# EAGLE board MicroMod_SAMD51-Panel (EAGLE 9.6.2), part 1 of 6
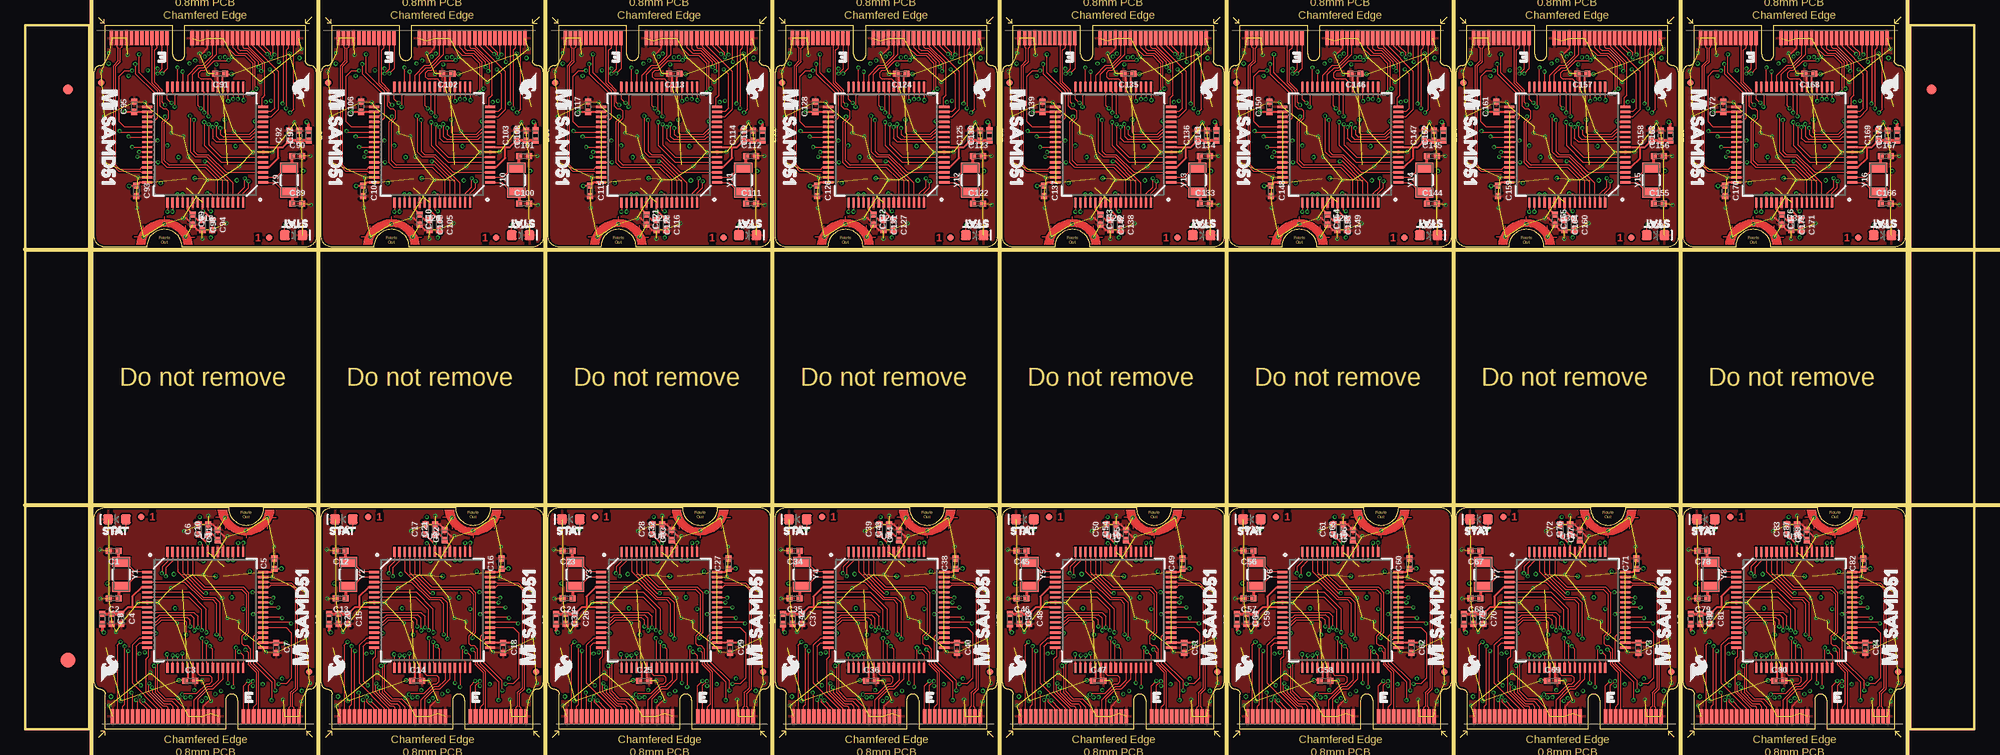
[diagram p0: board, top side]
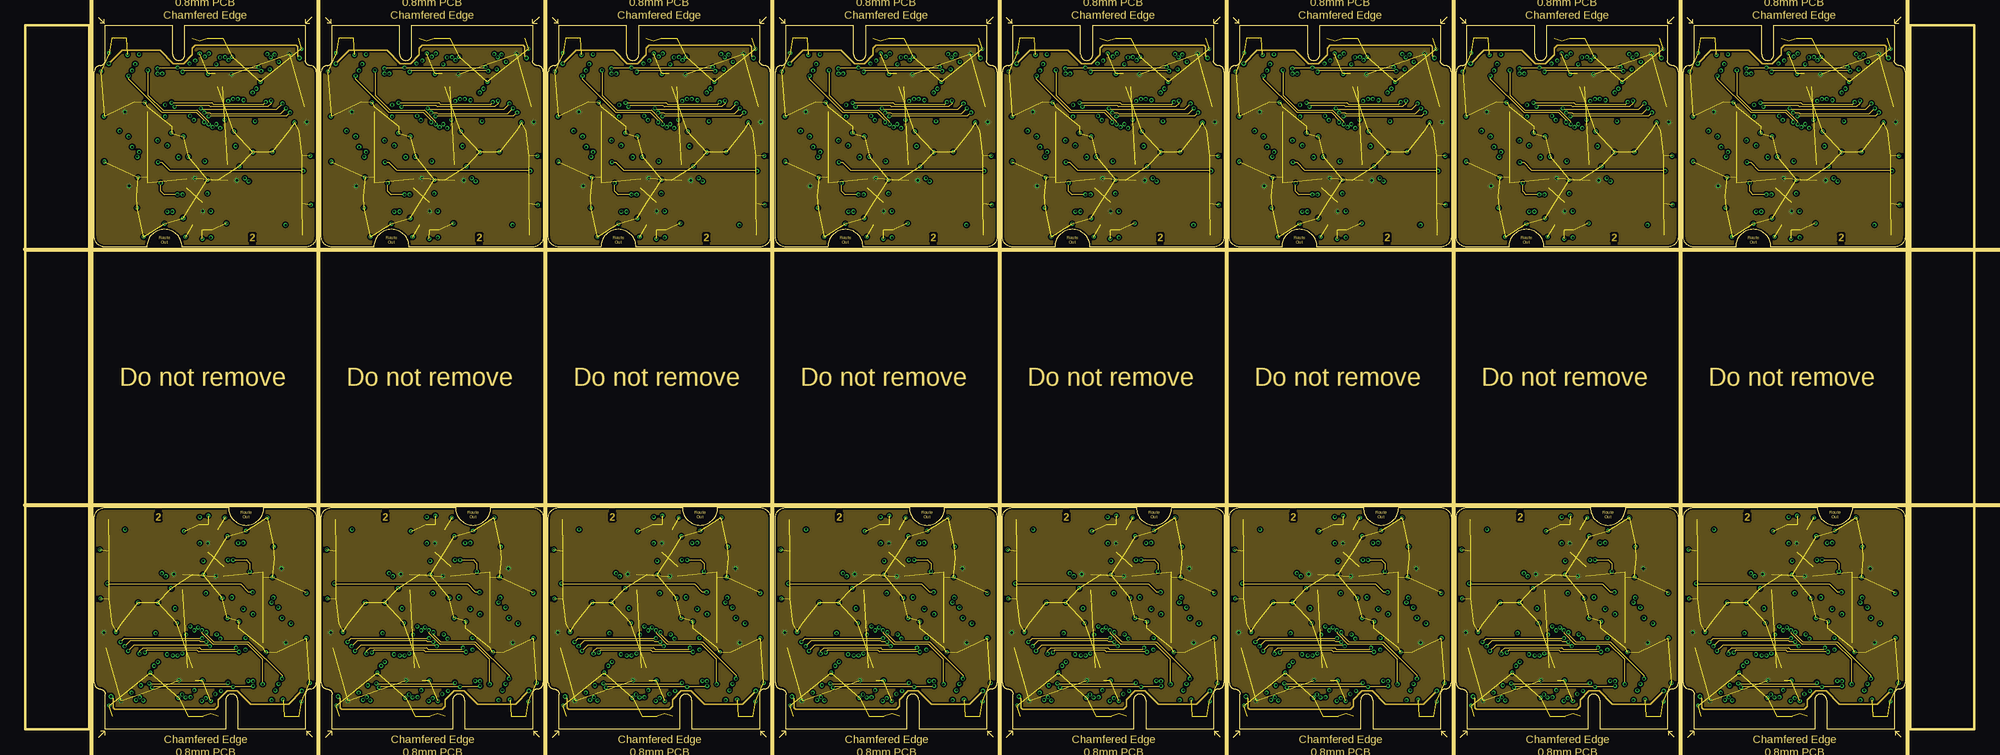
[diagram p1: board, inner layer Route2]
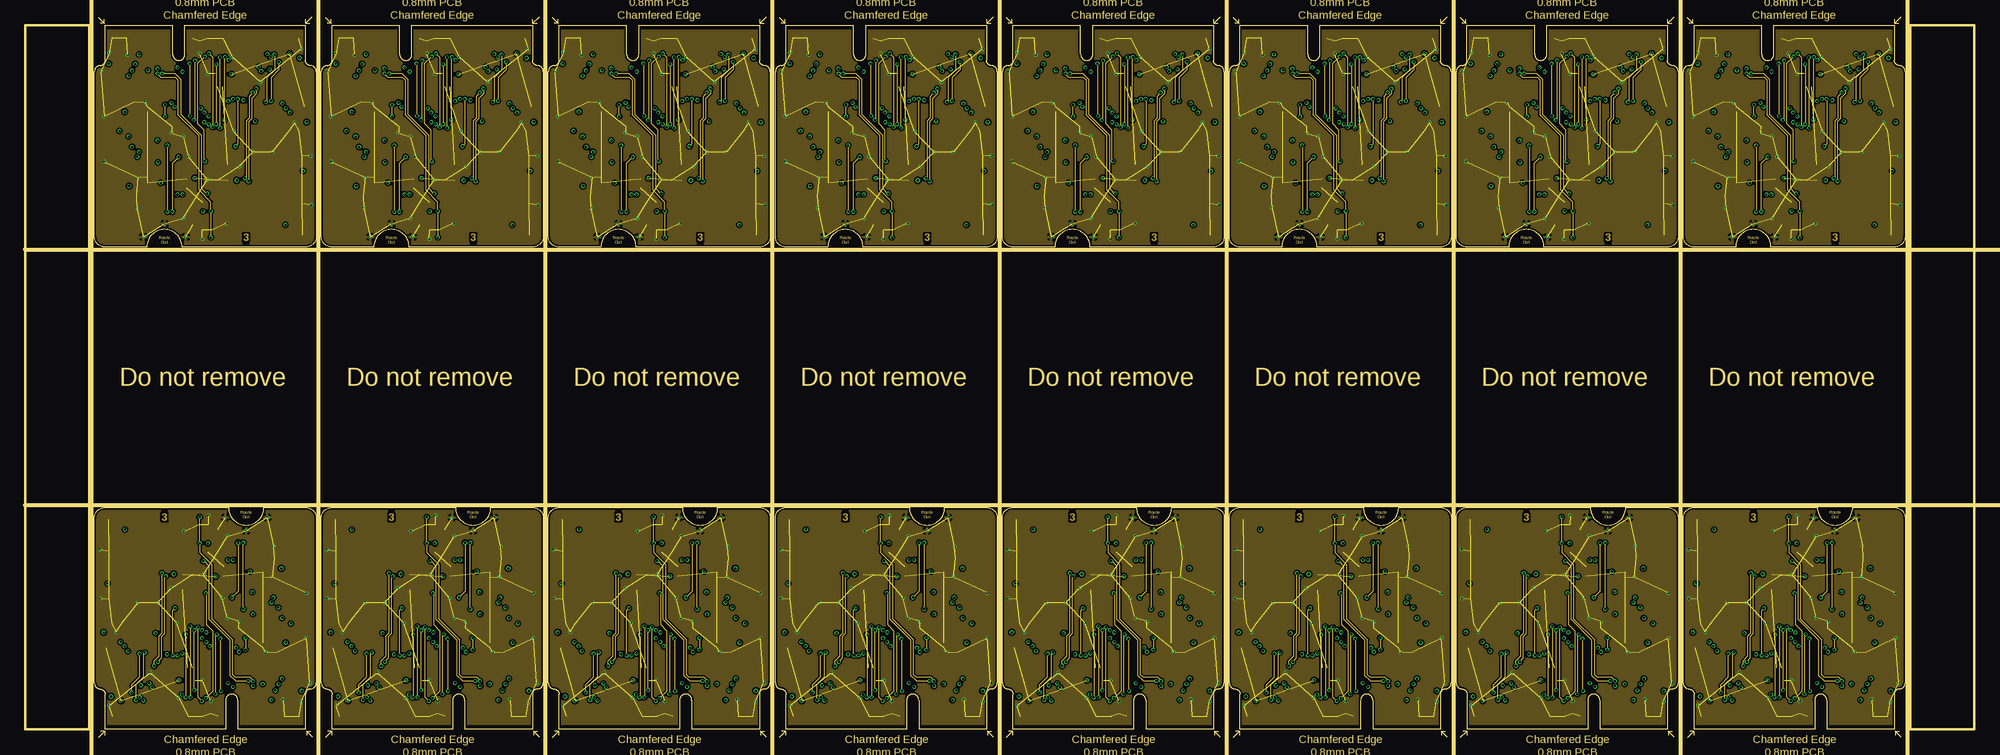
[diagram p2: board, inner layer Route15]
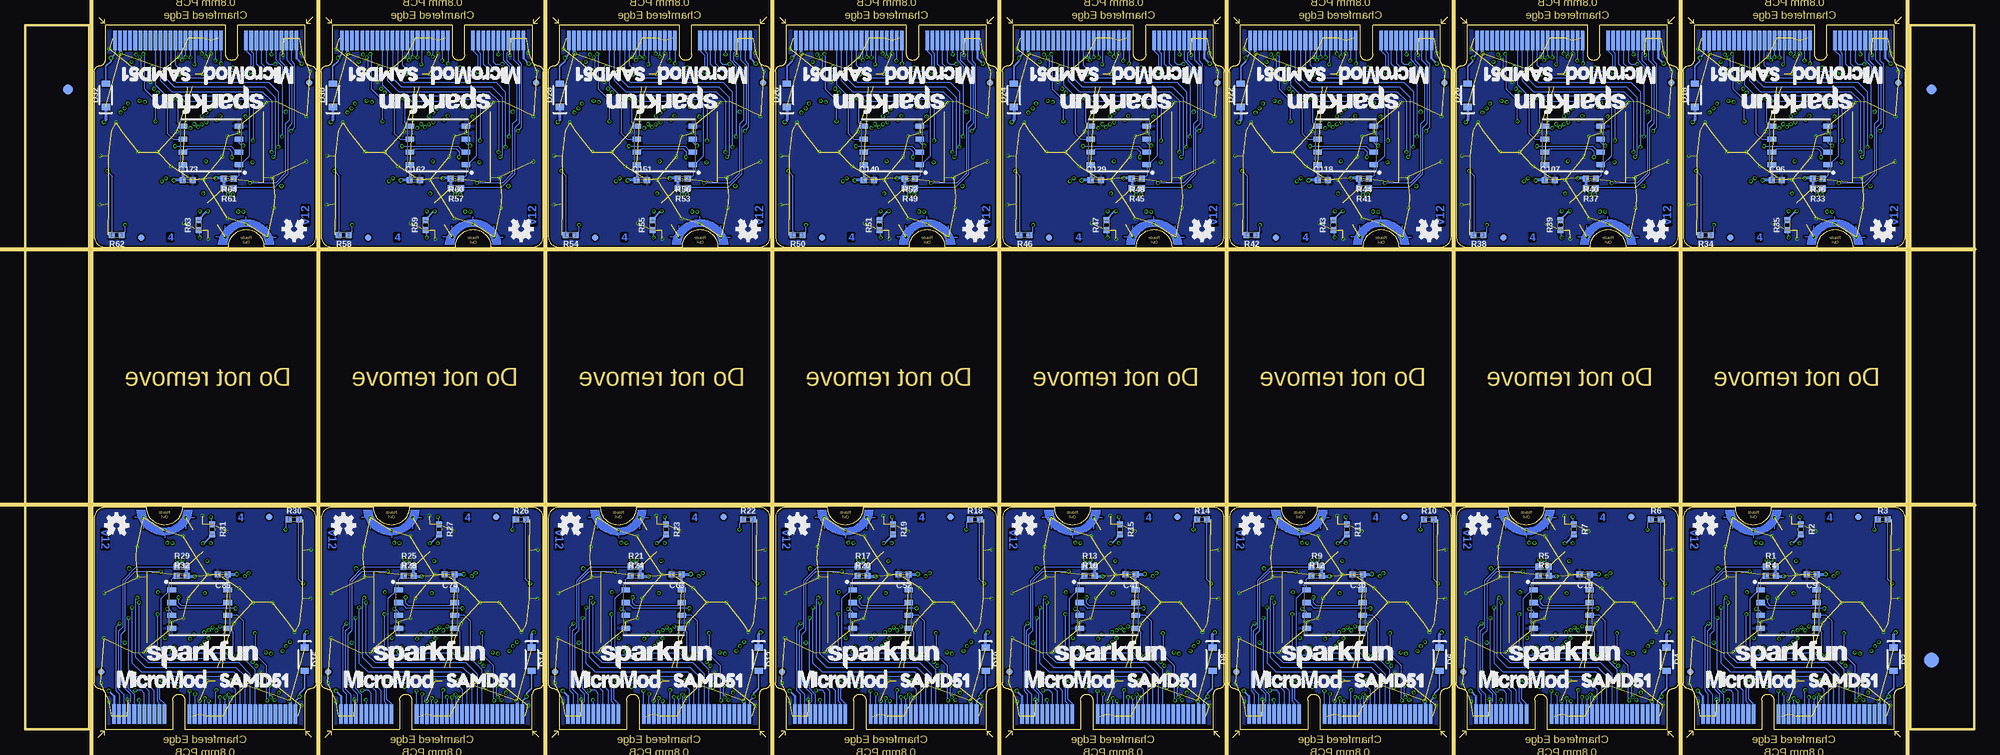
[diagram p3: board, bottom side, seen from below]

Size 193.27 x 69.85 mm. Coordinates in mm from the lower left corner, seen from the top.
Outline: 344 segments
Copper layers (1+2*15+16): Top 0.035mm / dielectric 1.5mm / Route2 0.035mm / dielectric 0.15mm / Route15 0.035mm / dielectric 0.2mm / Bottom 0.035mm
Design rules "MicroMod_SAMD51": minimum track width 4mil, minimum drill 0.2mm, track to track 4mil, track to pad 4mil, pad to pad 4mil, via to via 4mil, smd to smd 4mil, copper to edge 6mil, drill to drill 6mil, minimum pad ring 3mil, minimum via ring 3mil, stop-mask expansion 4mil, vias tented up to drill 25mil, thermal gap 10mil
Net classes: 0 default: width 0 mm, drill 0 mm; 1 Clock Signals: clearance 0.203 mm; 2 USB: width 0.102 mm, clearance 0.076 mm
Milling: 11 lines

## Footprints (pad centres in the part's own frame; a part is rotated, then mirrored left to right if it is on the bottom)
0402-TIGHT = smd 0.6 x 0.6: 1 -0.5,0; 2 0.5,0
LED-0603 = smd 1 x 1: A -0.877,0; C 0.877,0
SOD-323 = smd 0.63 x 0.83: A 1.15,0; C -1.15,0
FIDUCIAL-1X2 = smd 1 x 1: 1 0,0
FIDUCIAL-1.5X3 = smd 1.5 x 1.5: 1 0,0
FIDUCIAL-MICRO = smd 0.635 x 0.635: 1 0,0
M.2-CARD-E-22 = smd 0.35 x 1.45: 1 9.25,1.275; 3 8.75,1.275; 5 8.25,1.275; 7 7.75,1.275; 9 7.25,1.275; 11 6.75,1.275; 13 6.25,1.275; 15 5.75,1.275; 17 5.25,1.275; 19 4.75,1.275; 21 4.25,1.275; 23 3.75,1.275; 33 1.25,1.275; 35 0.75,1.275; 37 0.25,1.275; 39 -0.25,1.275; 41 -0.75,1.275; 43 -1.25,1.275; 45 -1.75,1.275; 47 -2.25,1.275; 49 -2.75,1.275; 51 -3.25,1.275; 53 -3.75,1.275; 55 -4.25,1.275; 57 -4.75,1.275; 59 -5.25,1.275; 61 -5.75,1.275; 63 -6.25,1.275; 65 -6.75,1.275; 67 -7.25,1.275; 69 -7.75,1.275; 71 -8.25,1.275; 73 -8.75,1.275; 75 -9.25,1.275 | smd 0.35 x 1.95 bottom: 2 9,1.525; 4 8.5,1.525; 6 8,1.525; 8 7.5,1.525; 10 7,1.525; 12 6.5,1.525; 14 6,1.525; 16 5.5,1.525; 18 5,1.525; 20 4.5,1.525; 22 4,1.525; 32 1.5,1.525; 34 1,1.525; 36 0.5,1.525; 38 0,1.525; 40 -0.5,1.525; 42 -1,1.525; 44 -1.5,1.525; 46 -2,1.525; 48 -2.5,1.525; 50 -3,1.525; 52 -3.5,1.525; 54 -4,1.525; 56 -4.5,1.525; 58 -5,1.525; 60 -5.5,1.525; 62 -6,1.525; 64 -6.5,1.525; 66 -7,1.525; 68 -7.5,1.525; 70 -8,1.525; 72 -8.5,1.525; 74 -9,1.525 | drill 0.2: GND1 1.9,21; GND2 4,19.7; GND3 6.1,21
WSON-8-6X5-NO_CENTERPAD = smd 0.85 x 0.5: 1 -2.775,1.905; 2 -2.775,0.635; 3 -2.775,-0.635; 4 -2.775,-1.905; 5 2.775,-1.905; 6 2.775,-0.635; 7 2.775,0.635; 8 2.775,1.905
TQFP64 = smd 0.22 x 1: 1 -3.75,-5.75; 2 -3.25,-5.75; 3 -2.75,-5.75; 4 -2.25,-5.75; 5 -1.75,-5.75; 6 -1.25,-5.75; 7 -0.75,-5.75; 8 -0.25,-5.75; 9 0.25,-5.75; 10 0.75,-5.75; 11 1.25,-5.75; 12 1.75,-5.75; 13 2.25,-5.75; 14 2.75,-5.75; 15 3.25,-5.75; 16 3.75,-5.75; 33 3.75,5.75; 34 3.25,5.75; 35 2.75,5.75; 36 2.25,5.75; 37 1.75,5.75; 38 1.25,5.75; 39 0.75,5.75; 40 0.25,5.75; 41 -0.25,5.75; 42 -0.75,5.75; 43 -1.25,5.75; 44 -1.75,5.75; 45 -2.25,5.75; 46 -2.75,5.75; 47 -3.25,5.75; 48 -3.75,5.75 | smd 1 x 0.22: 17 5.75,-3.75; 18 5.75,-3.25; 19 5.75,-2.75; 20 5.75,-2.25; 21 5.75,-1.75; 22 5.75,-1.25; 23 5.75,-0.75; 24 5.75,-0.25; 25 5.75,0.25; 26 5.75,0.75; 27 5.75,1.25; 28 5.75,1.75; 29 5.75,2.25; 30 5.75,2.75; 31 5.75,3.25; 32 5.75,3.75; 49 -5.75,3.75; 50 -5.75,3.25; 51 -5.75,2.75; 52 -5.75,2.25; 53 -5.75,1.75; 54 -5.75,1.25; 55 -5.75,0.75; 56 -5.75,0.25; 57 -5.75,-0.25; 58 -5.75,-0.75; 59 -5.75,-1.25; 60 -5.75,-1.75; 61 -5.75,-2.25; 62 -5.75,-2.75; 63 -5.75,-3.25; 64 -5.75,-3.75
CRYSTAL-SMD-3.2X1.5MM = smd 1 x 1.8: P$1 -1.25,0; P$2 1.25,0

## Placement (x,y rotation side)
C1  15pF  [0402-TIGHT]  8.76,17.71 180 top
C2  15pF  [0402-TIGHT]  8.76,12.98 180 top
C3  0.1uF  [0402-TIGHT]  16.36,4.83 0 top
C4  10uF  [0402-TIGHT]  9.52,10.95 270 top
C5  0.1uF  [0402-TIGHT]  24.71,16.43 90 top
C6  0.1uF  [0402-TIGHT]  17.19,19.84 90 top
C7  0.1uF  [0402-TIGHT]  24.89,8.1 270 top
C8  10uF  [0402-TIGHT]  8.56,10.95 270 top
C9  0.1uF  [0402-TIGHT]  16.13,15.37 180 bottom
C10  0.1uF  [0402-TIGHT]  18.14,19.84 90 top
C11  4.7uF  [0402-TIGHT]  19.1,19.27 90 top
C12  15pF  [0402-TIGHT]  31.27,17.71 180 top
C13  15pF  [0402-TIGHT]  31.27,12.98 180 top
C14  0.1uF  [0402-TIGHT]  38.87,4.83 0 top
C15  10uF  [0402-TIGHT]  32.02,10.95 270 top
C16  0.1uF  [0402-TIGHT]  47.22,16.43 90 top
C17  0.1uF  [0402-TIGHT]  39.7,19.84 90 top
C18  0.1uF  [0402-TIGHT]  47.4,8.1 270 top
C19  0.1uF  [0402-TIGHT]  38.64,15.37 180 bottom
C20  10uF  [0402-TIGHT]  31.07,10.95 270 top
C21  0.1uF  [0402-TIGHT]  40.65,19.84 90 top
C22  4.7uF  [0402-TIGHT]  41.61,19.27 90 top
C23  15pF  [0402-TIGHT]  53.78,17.71 180 top
C24  15pF  [0402-TIGHT]  53.78,12.98 180 top
C25  0.1uF  [0402-TIGHT]  61.38,4.83 0 top
C26  10uF  [0402-TIGHT]  54.53,10.95 270 top
C27  0.1uF  [0402-TIGHT]  69.73,16.43 90 top
C28  0.1uF  [0402-TIGHT]  62.2,19.84 90 top
C29  0.1uF  [0402-TIGHT]  69.91,8.1 270 top
C30  0.1uF  [0402-TIGHT]  61.15,15.37 180 bottom
C31  10uF  [0402-TIGHT]  53.58,10.95 270 top
C32  0.1uF  [0402-TIGHT]  63.16,19.84 90 top
C33  4.7uF  [0402-TIGHT]  64.12,19.27 90 top
C34  15pF  [0402-TIGHT]  76.29,17.71 180 top
C35  15pF  [0402-TIGHT]  76.29,12.98 180 top
C36  0.1uF  [0402-TIGHT]  83.89,4.83 0 top
C37  10uF  [0402-TIGHT]  77.04,10.95 270 top
C38  0.1uF  [0402-TIGHT]  92.24,16.43 90 top
C39  0.1uF  [0402-TIGHT]  84.71,19.84 90 top
C40  0.1uF  [0402-TIGHT]  92.42,8.1 270 top
C41  0.1uF  [0402-TIGHT]  83.65,15.37 180 bottom
C42  10uF  [0402-TIGHT]  76.09,10.95 270 top
C43  0.1uF  [0402-TIGHT]  85.66,19.84 90 top
C44  4.7uF  [0402-TIGHT]  86.63,19.27 90 top
C45  15pF  [0402-TIGHT]  98.8,17.71 180 top
C46  15pF  [0402-TIGHT]  98.8,12.98 180 top
C47  0.1uF  [0402-TIGHT]  106.4,4.83 0 top
C48  10uF  [0402-TIGHT]  99.55,10.95 270 top
C49  0.1uF  [0402-TIGHT]  114.75,16.43 90 top
C50  0.1uF  [0402-TIGHT]  107.22,19.84 90 top
C51  0.1uF  [0402-TIGHT]  114.93,8.1 270 top
C52  0.1uF  [0402-TIGHT]  106.16,15.37 180 bottom
C53  10uF  [0402-TIGHT]  98.6,10.95 270 top
C54  0.1uF  [0402-TIGHT]  108.17,19.84 90 top
C55  4.7uF  [0402-TIGHT]  109.14,19.27 90 top
C56  15pF  [0402-TIGHT]  121.3,17.71 180 top
C57  15pF  [0402-TIGHT]  121.3,12.98 180 top
C58  0.1uF  [0402-TIGHT]  128.9,4.83 0 top
C59  10uF  [0402-TIGHT]  122.06,10.95 270 top
C60  0.1uF  [0402-TIGHT]  137.25,16.43 90 top
C61  0.1uF  [0402-TIGHT]  129.73,19.84 90 top
C62  0.1uF  [0402-TIGHT]  137.43,8.1 270 top
C63  0.1uF  [0402-TIGHT]  128.67,15.37 180 bottom
C64  10uF  [0402-TIGHT]  121.1,10.95 270 top
C65  0.1uF  [0402-TIGHT]  130.68,19.84 90 top
C66  4.7uF  [0402-TIGHT]  131.64,19.27 90 top
C67  15pF  [0402-TIGHT]  143.81,17.71 180 top
C68  15pF  [0402-TIGHT]  143.81,12.98 180 top
C69  0.1uF  [0402-TIGHT]  151.41,4.83 0 top
C70  10uF  [0402-TIGHT]  144.57,10.95 270 top
C71  0.1uF  [0402-TIGHT]  159.76,16.43 90 top
C72  0.1uF  [0402-TIGHT]  152.24,19.84 90 top
C73  0.1uF  [0402-TIGHT]  159.94,8.1 270 top
C74  0.1uF  [0402-TIGHT]  151.18,15.37 180 bottom
C75  10uF  [0402-TIGHT]  143.61,10.95 270 top
C76  0.1uF  [0402-TIGHT]  153.19,19.84 90 top
C77  4.7uF  [0402-TIGHT]  154.15,19.27 90 top
C78  15pF  [0402-TIGHT]  166.32,17.71 180 top
C79  15pF  [0402-TIGHT]  166.32,12.98 180 top
C80  0.1uF  [0402-TIGHT]  173.92,4.83 0 top
C81  10uF  [0402-TIGHT]  167.07,10.95 270 top
C82  0.1uF  [0402-TIGHT]  182.27,16.43 90 top
C83  0.1uF  [0402-TIGHT]  174.74,19.84 90 top
C84  0.1uF  [0402-TIGHT]  182.45,8.1 270 top
C85  0.1uF  [0402-TIGHT]  173.69,15.37 180 bottom
C86  10uF  [0402-TIGHT]  166.12,10.95 270 top
C87  0.1uF  [0402-TIGHT]  175.7,19.84 90 top
C88  4.7uF  [0402-TIGHT]  176.66,19.27 90 top
C89  15pF  [0402-TIGHT]  26.95,52.14 0 top
C90  15pF  [0402-TIGHT]  26.95,56.87 0 top
C91  0.1uF  [0402-TIGHT]  19.35,65.02 180 top
C92  10uF  [0402-TIGHT]  26.2,58.9 90 top
C93  0.1uF  [0402-TIGHT]  11,53.42 270 top
C94  0.1uF  [0402-TIGHT]  18.53,50.01 270 top
C95  0.1uF  [0402-TIGHT]  10.82,61.75 90 top
C96  0.1uF  [0402-TIGHT]  19.59,54.48 0 bottom
C97  10uF  [0402-TIGHT]  27.15,58.9 90 top
C98  0.1uF  [0402-TIGHT]  17.57,50.01 270 top
C99  4.7uF  [0402-TIGHT]  16.61,50.58 270 top
C100  15pF  [0402-TIGHT]  49.46,52.14 0 top
C101  15pF  [0402-TIGHT]  49.46,56.87 0 top
C102  0.1uF  [0402-TIGHT]  41.86,65.02 180 top
C103  10uF  [0402-TIGHT]  48.71,58.9 90 top
C104  0.1uF  [0402-TIGHT]  33.51,53.42 270 top
C105  0.1uF  [0402-TIGHT]  41.04,50.01 270 top
C106  0.1uF  [0402-TIGHT]  33.33,61.75 90 top
C107  0.1uF  [0402-TIGHT]  42.1,54.48 0 bottom
C108  10uF  [0402-TIGHT]  49.66,58.9 90 top
C109  0.1uF  [0402-TIGHT]  40.08,50.01 270 top
C110  4.7uF  [0402-TIGHT]  39.12,50.58 270 top
C111  15pF  [0402-TIGHT]  71.97,52.14 0 top
C112  15pF  [0402-TIGHT]  71.97,56.87 0 top
C113  0.1uF  [0402-TIGHT]  64.37,65.02 180 top
C114  10uF  [0402-TIGHT]  71.22,58.9 90 top
C115  0.1uF  [0402-TIGHT]  56.02,53.42 270 top
C116  0.1uF  [0402-TIGHT]  63.54,50.01 270 top
C117  0.1uF  [0402-TIGHT]  55.84,61.75 90 top
C118  0.1uF  [0402-TIGHT]  64.6,54.48 0 bottom
C119  10uF  [0402-TIGHT]  72.17,58.9 90 top
C120  0.1uF  [0402-TIGHT]  62.59,50.01 270 top
C121  4.7uF  [0402-TIGHT]  61.63,50.58 270 top
C122  15pF  [0402-TIGHT]  94.48,52.14 0 top
C123  15pF  [0402-TIGHT]  94.48,56.87 0 top
C124  0.1uF  [0402-TIGHT]  86.88,65.02 180 top
C125  10uF  [0402-TIGHT]  93.72,58.9 90 top
C126  0.1uF  [0402-TIGHT]  78.53,53.42 270 top
C127  0.1uF  [0402-TIGHT]  86.05,50.01 270 top
C128  0.1uF  [0402-TIGHT]  78.35,61.75 90 top
C129  0.1uF  [0402-TIGHT]  87.11,54.48 0 bottom
C130  10uF  [0402-TIGHT]  94.68,58.9 90 top
C131  0.1uF  [0402-TIGHT]  85.1,50.01 270 top
C132  4.7uF  [0402-TIGHT]  84.14,50.58 270 top
C133  15pF  [0402-TIGHT]  116.98,52.14 0 top
C134  15pF  [0402-TIGHT]  116.98,56.87 0 top
C135  0.1uF  [0402-TIGHT]  109.38,65.02 180 top
C136  10uF  [0402-TIGHT]  116.23,58.9 90 top
C137  0.1uF  [0402-TIGHT]  101.03,53.42 270 top
C138  0.1uF  [0402-TIGHT]  108.56,50.01 270 top
C139  0.1uF  [0402-TIGHT]  100.85,61.75 90 top
C140  0.1uF  [0402-TIGHT]  109.62,54.48 0 bottom
C141  10uF  [0402-TIGHT]  117.18,58.9 90 top
C142  0.1uF  [0402-TIGHT]  107.61,50.01 270 top
C143  4.7uF  [0402-TIGHT]  106.64,50.58 270 top
C144  15pF  [0402-TIGHT]  139.49,52.14 0 top
C145  15pF  [0402-TIGHT]  139.49,56.87 0 top
C146  0.1uF  [0402-TIGHT]  131.89,65.02 180 top
C147  10uF  [0402-TIGHT]  138.74,58.9 90 top
C148  0.1uF  [0402-TIGHT]  123.54,53.42 270 top
C149  0.1uF  [0402-TIGHT]  131.07,50.01 270 top
C150  0.1uF  [0402-TIGHT]  123.36,61.75 90 top
C151  0.1uF  [0402-TIGHT]  132.13,54.48 0 bottom
C152  10uF  [0402-TIGHT]  139.69,58.9 90 top
C153  0.1uF  [0402-TIGHT]  130.12,50.01 270 top
C154  4.7uF  [0402-TIGHT]  129.15,50.58 270 top
C155  15pF  [0402-TIGHT]  162,52.14 0 top
C156  15pF  [0402-TIGHT]  162,56.87 0 top
C157  0.1uF  [0402-TIGHT]  154.4,65.02 180 top
C158  10uF  [0402-TIGHT]  161.25,58.9 90 top
C159  0.1uF  [0402-TIGHT]  146.05,53.42 270 top
C160  0.1uF  [0402-TIGHT]  153.58,50.01 270 top
C161  0.1uF  [0402-TIGHT]  145.87,61.75 90 top
C162  0.1uF  [0402-TIGHT]  154.64,54.48 0 bottom
C163  10uF  [0402-TIGHT]  162.2,58.9 90 top
C164  0.1uF  [0402-TIGHT]  152.62,50.01 270 top
C165  4.7uF  [0402-TIGHT]  151.66,50.58 270 top
C166  15pF  [0402-TIGHT]  184.51,52.14 0 top
C167  15pF  [0402-TIGHT]  184.51,56.87 0 top
C168  0.1uF  [0402-TIGHT]  176.91,65.02 180 top
C169  10uF  [0402-TIGHT]  183.76,58.9 90 top
C170  0.1uF  [0402-TIGHT]  168.56,53.42 270 top
C171  0.1uF  [0402-TIGHT]  176.08,50.01 270 top
C172  0.1uF  [0402-TIGHT]  168.38,61.75 90 top
C173  0.1uF  [0402-TIGHT]  177.14,54.48 0 bottom
C174  10uF  [0402-TIGHT]  184.71,58.9 90 top
C175  0.1uF  [0402-TIGHT]  175.13,50.01 270 top
C176  4.7uF  [0402-TIGHT]  174.17,50.58 270 top
D1  BLUE  [LED-0603]  9.09,20.83 180 top
D2  BLUE  [LED-0603]  31.6,20.83 180 top
D3  1A/23V/620mV  [SOD-323]  8,6.95 270 bottom
D4  1A/23V/620mV  [SOD-323]  30.51,6.95 270 bottom
D5  BLUE  [LED-0603]  54.11,20.83 180 top
D6  1A/23V/620mV  [SOD-323]  53.02,6.95 270 bottom
D7  BLUE  [LED-0603]  76.62,20.83 180 top
D8  1A/23V/620mV  [SOD-323]  75.52,6.95 270 bottom
D9  BLUE  [LED-0603]  99.13,20.83 180 top
D10  1A/23V/620mV  [SOD-323]  98.03,6.95 270 bottom
D11  BLUE  [LED-0603]  121.63,20.83 180 top
D12  1A/23V/620mV  [SOD-323]  120.54,6.95 270 bottom
D13  BLUE  [LED-0603]  144.14,20.83 180 top
D14  1A/23V/620mV  [SOD-323]  143.05,6.95 270 bottom
D15  BLUE  [LED-0603]  166.65,20.83 180 top
D16  1A/23V/620mV  [SOD-323]  165.56,6.95 270 bottom
D17  BLUE  [LED-0603]  26.62,49.02 0 top
D18  1A/23V/620mV  [SOD-323]  27.71,62.9 90 bottom
D19  BLUE  [LED-0603]  49.13,49.02 0 top
D20  1A/23V/620mV  [SOD-323]  50.22,62.9 90 bottom
D21  BLUE  [LED-0603]  71.64,49.02 0 top
D22  1A/23V/620mV  [SOD-323]  72.73,62.9 90 bottom
D23  BLUE  [LED-0603]  94.15,49.02 0 top
D24  1A/23V/620mV  [SOD-323]  95.24,62.9 90 bottom
D25  BLUE  [LED-0603]  116.65,49.02 0 top
D26  1A/23V/620mV  [SOD-323]  117.75,62.9 90 bottom
D27  BLUE  [LED-0603]  139.16,49.02 0 top
D28  1A/23V/620mV  [SOD-323]  140.26,62.9 90 bottom
D29  BLUE  [LED-0603]  161.67,49.02 0 top
D30  1A/23V/620mV  [SOD-323]  162.76,62.9 90 bottom
D31  BLUE  [LED-0603]  184.18,49.02 0 top
D32  1A/23V/620mV  [SOD-323]  185.27,62.9 90 bottom
E$1  [FIDUCIAL-1X2]  4.23,63.5 0 top
E$2  [FIDUCIAL-1X2]  4.23,63.5 0 bottom
E$3  [FIDUCIAL-1X2]  189.04,63.5 0 top
E$4  [FIDUCIAL-1X2]  189.04,63.5 0 bottom
E$5  [FIDUCIAL-1.5X3]  4.23,6.86 0 top
E$6  [FIDUCIAL-1.5X3]  4.23,6.86 0 bottom
FD1  FIDUCIALUFIDUCIAL  [FIDUCIAL-MICRO]  34.01,21.08 0 top
FD2  FIDUCIALUFIDUCIAL  [FIDUCIAL-MICRO]  34.01,21.08 0 bottom
FD3  FIDUCIALUFIDUCIAL  [FIDUCIAL-MICRO]  50.68,5.71 0 bottom
FD4  FIDUCIALUFIDUCIAL  [FIDUCIAL-MICRO]  50.68,5.71 0 top
FD5  FIDUCIALUFIDUCIAL  [FIDUCIAL-MICRO]  11.51,21.08 0 top
FD6  FIDUCIALUFIDUCIAL  [FIDUCIAL-MICRO]  11.51,21.08 0 bottom
FD7  FIDUCIALUFIDUCIAL  [FIDUCIAL-MICRO]  28.17,5.71 0 bottom
FD8  FIDUCIALUFIDUCIAL  [FIDUCIAL-MICRO]  28.17,5.71 0 top
FD9  FIDUCIALUFIDUCIAL  [FIDUCIAL-MICRO]  56.52,21.08 0 top
FD10  FIDUCIALUFIDUCIAL  [FIDUCIAL-MICRO]  56.52,21.08 0 bottom
FD11  FIDUCIALUFIDUCIAL  [FIDUCIAL-MICRO]  73.19,5.71 0 bottom
FD12  FIDUCIALUFIDUCIAL  [FIDUCIAL-MICRO]  73.19,5.71 0 top
FD13  FIDUCIALUFIDUCIAL  [FIDUCIAL-MICRO]  79.03,21.08 0 top
FD14  FIDUCIALUFIDUCIAL  [FIDUCIAL-MICRO]  79.03,21.08 0 bottom
FD15  FIDUCIALUFIDUCIAL  [FIDUCIAL-MICRO]  95.69,5.71 0 bottom
FD16  FIDUCIALUFIDUCIAL  [FIDUCIAL-MICRO]  95.69,5.71 0 top
FD17  FIDUCIALUFIDUCIAL  [FIDUCIAL-MICRO]  101.54,21.08 0 top
FD18  FIDUCIALUFIDUCIAL  [FIDUCIAL-MICRO]  101.54,21.08 0 bottom
FD19  FIDUCIALUFIDUCIAL  [FIDUCIAL-MICRO]  118.2,5.71 0 bottom
FD20  FIDUCIALUFIDUCIAL  [FIDUCIAL-MICRO]  118.2,5.71 0 top
FD21  FIDUCIALUFIDUCIAL  [FIDUCIAL-MICRO]  124.05,21.08 0 top
FD22  FIDUCIALUFIDUCIAL  [FIDUCIAL-MICRO]  124.05,21.08 0 bottom
FD23  FIDUCIALUFIDUCIAL  [FIDUCIAL-MICRO]  140.71,5.71 0 bottom
FD24  FIDUCIALUFIDUCIAL  [FIDUCIAL-MICRO]  140.71,5.71 0 top
FD25  FIDUCIALUFIDUCIAL  [FIDUCIAL-MICRO]  146.56,21.08 0 top
FD26  FIDUCIALUFIDUCIAL  [FIDUCIAL-MICRO]  146.56,21.08 0 bottom
FD27  FIDUCIALUFIDUCIAL  [FIDUCIAL-MICRO]  163.22,5.71 0 bottom
FD28  FIDUCIALUFIDUCIAL  [FIDUCIAL-MICRO]  163.22,5.71 0 top
FD29  FIDUCIALUFIDUCIAL  [FIDUCIAL-MICRO]  169.06,21.08 0 top
FD30  FIDUCIALUFIDUCIAL  [FIDUCIAL-MICRO]  169.06,21.08 0 bottom
FD31  FIDUCIALUFIDUCIAL  [FIDUCIAL-MICRO]  185.72,5.71 0 bottom
FD32  FIDUCIALUFIDUCIAL  [FIDUCIAL-MICRO]  185.72,5.71 0 top
FD33  FIDUCIALUFIDUCIAL  [FIDUCIAL-MICRO]  24.21,48.77 180 top
FD34  FIDUCIALUFIDUCIAL  [FIDUCIAL-MICRO]  24.21,48.77 180 bottom
FD35  FIDUCIALUFIDUCIAL  [FIDUCIAL-MICRO]  7.55,64.14 180 bottom
FD36  FIDUCIALUFIDUCIAL  [FIDUCIAL-MICRO]  7.55,64.14 180 top
FD37  FIDUCIALUFIDUCIAL  [FIDUCIAL-MICRO]  46.72,48.77 180 top
FD38  FIDUCIALUFIDUCIAL  [FIDUCIAL-MICRO]  46.72,48.77 180 bottom
FD39  FIDUCIALUFIDUCIAL  [FIDUCIAL-MICRO]  30.06,64.14 180 bottom
FD40  FIDUCIALUFIDUCIAL  [FIDUCIAL-MICRO]  30.06,64.14 180 top
FD41  FIDUCIALUFIDUCIAL  [FIDUCIAL-MICRO]  69.23,48.77 180 top
FD42  FIDUCIALUFIDUCIAL  [FIDUCIAL-MICRO]  69.23,48.77 180 bottom
FD43  FIDUCIALUFIDUCIAL  [FIDUCIAL-MICRO]  52.56,64.14 180 bottom
FD44  FIDUCIALUFIDUCIAL  [FIDUCIAL-MICRO]  52.56,64.14 180 top
FD45  FIDUCIALUFIDUCIAL  [FIDUCIAL-MICRO]  91.73,48.77 180 top
FD46  FIDUCIALUFIDUCIAL  [FIDUCIAL-MICRO]  91.73,48.77 180 bottom
FD47  FIDUCIALUFIDUCIAL  [FIDUCIAL-MICRO]  75.07,64.14 180 bottom
FD48  FIDUCIALUFIDUCIAL  [FIDUCIAL-MICRO]  75.07,64.14 180 top
FD49  FIDUCIALUFIDUCIAL  [FIDUCIAL-MICRO]  114.24,48.77 180 top
FD50  FIDUCIALUFIDUCIAL  [FIDUCIAL-MICRO]  114.24,48.77 180 bottom
FD51  FIDUCIALUFIDUCIAL  [FIDUCIAL-MICRO]  97.58,64.14 180 bottom
FD52  FIDUCIALUFIDUCIAL  [FIDUCIAL-MICRO]  97.58,64.14 180 top
FD53  FIDUCIALUFIDUCIAL  [FIDUCIAL-MICRO]  136.75,48.77 180 top
FD54  FIDUCIALUFIDUCIAL  [FIDUCIAL-MICRO]  136.75,48.77 180 bottom
FD55  FIDUCIALUFIDUCIAL  [FIDUCIAL-MICRO]  120.09,64.14 180 bottom
FD56  FIDUCIALUFIDUCIAL  [FIDUCIAL-MICRO]  120.09,64.14 180 top
FD57  FIDUCIALUFIDUCIAL  [FIDUCIAL-MICRO]  159.26,48.77 180 top
FD58  FIDUCIALUFIDUCIAL  [FIDUCIAL-MICRO]  159.26,48.77 180 bottom
FD59  FIDUCIALUFIDUCIAL  [FIDUCIAL-MICRO]  142.6,64.14 180 bottom
FD60  FIDUCIALUFIDUCIAL  [FIDUCIAL-MICRO]  142.6,64.14 180 top
FD61  FIDUCIALUFIDUCIAL  [FIDUCIAL-MICRO]  181.76,48.77 180 top
FD62  FIDUCIALUFIDUCIAL  [FIDUCIAL-MICRO]  181.76,48.77 180 bottom
FD63  FIDUCIALUFIDUCIAL  [FIDUCIAL-MICRO]  165.1,64.14 180 bottom
FD64  FIDUCIALUFIDUCIAL  [FIDUCIAL-MICRO]  165.1,64.14 180 top
J1  MICROMOD-2222  [M.2-CARD-E-22]  40.41,0 0 top
J2  MICROMOD-2222  [M.2-CARD-E-22]  17.91,0 0 top
J3  MICROMOD-2222  [M.2-CARD-E-22]  62.92,0 0 top
J4  MICROMOD-2222  [M.2-CARD-E-22]  85.43,0 0 top
J5  MICROMOD-2222  [M.2-CARD-E-22]  107.94,0 0 top
J6  MICROMOD-2222  [M.2-CARD-E-22]  130.45,0 0 top
J7  MICROMOD-2222  [M.2-CARD-E-22]  152.96,0 0 top
J8  MICROMOD-2222  [M.2-CARD-E-22]  175.46,0 0 top
J9  MICROMOD-2222  [M.2-CARD-E-22]  17.81,69.85 180 top
J10  MICROMOD-2222  [M.2-CARD-E-22]  40.32,69.85 180 top
J11  MICROMOD-2222  [M.2-CARD-E-22]  62.82,69.85 180 top
J12  MICROMOD-2222  [M.2-CARD-E-22]  85.33,69.85 180 top
J13  MICROMOD-2222  [M.2-CARD-E-22]  107.84,69.85 180 top
J14  MICROMOD-2222  [M.2-CARD-E-22]  130.35,69.85 180 top
J15  MICROMOD-2222  [M.2-CARD-E-22]  152.86,69.85 180 top
J16  MICROMOD-2222  [M.2-CARD-E-22]  175.36,69.85 180 top
L1  30Ω  [0402-TIGHT]  7.62,10.94 90 top
L2  30Ω  [0402-TIGHT]  30.13,10.94 90 top
L3  30Ω  [0402-TIGHT]  52.64,10.94 90 top
L4  30Ω  [0402-TIGHT]  75.15,10.94 90 top
L5  30Ω  [0402-TIGHT]  97.66,10.94 90 top
L6  30Ω  [0402-TIGHT]  120.16,10.94 90 top
L7  30Ω  [0402-TIGHT]  142.67,10.94 90 top
L8  30Ω  [0402-TIGHT]  165.18,10.94 90 top
L9  30Ω  [0402-TIGHT]  28.09,58.91 270 top
L10  30Ω  [0402-TIGHT]  50.6,58.91 270 top
L11  30Ω  [0402-TIGHT]  73.11,58.91 270 top
L12  30Ω  [0402-TIGHT]  95.62,58.91 270 top
L13  30Ω  [0402-TIGHT]  118.12,58.91 270 top
L14  30Ω  [0402-TIGHT]  140.63,58.91 270 top
L15  30Ω  [0402-TIGHT]  163.14,58.91 270 top
L16  30Ω  [0402-TIGHT]  185.65,58.91 270 top
LOGO1  OSHW-LOGOMINI  [OSHW-LOGO-MINI]  49.17,20.24 0 bottom
LOGO2  OSHW-LOGOMINI  [OSHW-LOGO-MINI]  26.66,20.24 0 bottom
LOGO3  SFE_LOGO_NAME.1_INCH  [SFE_LOGO_NAME_.1]  40.63,7.4 0 bottom
LOGO4  OSHW-LOGOMINI  [OSHW-LOGO-MINI]  71.68,20.24 0 bottom
LOGO5  SFE_LOGO_NAME.1_INCH  [SFE_LOGO_NAME_.1]  63.13,7.4 0 bottom
LOGO6  SFE_LOGO_NAME.1_INCH  [SFE_LOGO_NAME_.1]  18.12,7.4 0 bottom
LOGO7  OSHW-LOGOMINI  [OSHW-LOGO-MINI]  94.19,20.24 0 bottom
LOGO8  SFE_LOGO_NAME.1_INCH  [SFE_LOGO_NAME_.1]  85.64,7.4 0 bottom
LOGO9  OSHW-LOGOMINI  [OSHW-LOGO-MINI]  116.7,20.24 0 bottom
LOGO10  SFE_LOGO_NAME.1_INCH  [SFE_LOGO_NAME_.1]  108.15,7.4 0 bottom
LOGO11  OSHW-LOGOMINI  [OSHW-LOGO-MINI]  139.2,20.24 0 bottom
LOGO12  SFE_LOGO_NAME.1_INCH  [SFE_LOGO_NAME_.1]  130.66,7.4 0 bottom
LOGO13  OSHW-LOGOMINI  [OSHW-LOGO-MINI]  161.71,20.24 0 bottom
LOGO14  SFE_LOGO_NAME.1_INCH  [SFE_LOGO_NAME_.1]  153.17,7.4 0 bottom
LOGO15  OSHW-LOGOMINI  [OSHW-LOGO-MINI]  184.22,20.24 0 bottom
LOGO16  SFE_LOGO_NAME.1_INCH  [SFE_LOGO_NAME_.1]  175.67,7.4 0 bottom
LOGO17  OSHW-LOGOMINI  [OSHW-LOGO-MINI]  9.05,49.61 180 bottom
LOGO18  SFE_LOGO_NAME.1_INCH  [SFE_LOGO_NAME_.1]  17.6,62.45 180 bottom
LOGO19  OSHW-LOGOMINI  [OSHW-LOGO-MINI]  31.56,49.61 180 bottom
LOGO20  SFE_LOGO_NAME.1_INCH  [SFE_LOGO_NAME_.1]  40.11,62.45 180 bottom
LOGO21  OSHW-LOGOMINI  [OSHW-LOGO-MINI]  54.07,49.61 180 bottom
LOGO22  SFE_LOGO_NAME.1_INCH  [SFE_LOGO_NAME_.1]  62.61,62.45 180 bottom
LOGO23  OSHW-LOGOMINI  [OSHW-LOGO-MINI]  76.58,49.61 180 bottom
LOGO24  SFE_LOGO_NAME.1_INCH  [SFE_LOGO_NAME_.1]  85.12,62.45 180 bottom
LOGO25  OSHW-LOGOMINI  [OSHW-LOGO-MINI]  99.09,49.61 180 bottom
LOGO26  SFE_LOGO_NAME.1_INCH  [SFE_LOGO_NAME_.1]  107.63,62.45 180 bottom
LOGO27  OSHW-LOGOMINI  [OSHW-LOGO-MINI]  121.6,49.61 180 bottom
LOGO28  SFE_LOGO_NAME.1_INCH  [SFE_LOGO_NAME_.1]  130.14,62.45 180 bottom
LOGO29  OSHW-LOGOMINI  [OSHW-LOGO-MINI]  144.1,49.61 180 bottom
LOGO30  SFE_LOGO_NAME.1_INCH  [SFE_LOGO_NAME_.1]  152.65,62.45 180 bottom
LOGO31  OSHW-LOGOMINI  [OSHW-LOGO-MINI]  166.61,49.61 180 bottom
LOGO32  SFE_LOGO_NAME.1_INCH  [SFE_LOGO_NAME_.1]  175.15,62.45 180 bottom
R1  10k  [0402-TIGHT]  20.19,16.14 0 bottom
R2  1k  [0402-TIGHT]  17.19,19.84 270 bottom
R3  1k  [0402-TIGHT]  9.07,20.83 0 bottom
R4  100k  [0402-TIGHT]  20.19,15.22 0 bottom
R5  10k  [0402-TIGHT]  42.7,16.14 0 bottom
R6  1k  [0402-TIGHT]  31.57,20.83 0 bottom
R7  1k  [0402-TIGHT]  39.7,19.84 270 bottom
R8  100k  [0402-TIGHT]  42.7,15.22 0 bottom
R9  10k  [0402-TIGHT]  65.21,16.14 0 bottom
R10  1k  [0402-TIGHT]  54.08,20.83 0 bottom
R11  1k  [0402-TIGHT]  62.21,19.84 270 bottom
R12  100k  [0402-TIGHT]  65.21,15.22 0 bottom
R13  10k  [0402-TIGHT]  87.72,16.14 0 bottom
R14  1k  [0402-TIGHT]  76.59,20.83 0 bottom
R15  1k  [0402-TIGHT]  84.71,19.84 270 bottom
R16  100k  [0402-TIGHT]  87.72,15.22 0 bottom
R17  10k  [0402-TIGHT]  110.23,16.14 0 bottom
R18  1k  [0402-TIGHT]  99.1,20.83 0 bottom
R19  1k  [0402-TIGHT]  107.22,19.84 270 bottom
R20  100k  [0402-TIGHT]  110.23,15.22 0 bottom
R21  10k  [0402-TIGHT]  132.73,16.14 0 bottom
R22  1k  [0402-TIGHT]  121.61,20.83 0 bottom
R23  1k  [0402-TIGHT]  129.73,19.84 270 bottom
R24  100k  [0402-TIGHT]  132.73,15.22 0 bottom
R25  10k  [0402-TIGHT]  155.24,16.14 0 bottom
R26  1k  [0402-TIGHT]  144.12,20.83 0 bottom
R27  1k  [0402-TIGHT]  152.24,19.84 270 bottom
R28  100k  [0402-TIGHT]  155.24,15.22 0 bottom
R29  10k  [0402-TIGHT]  177.75,16.14 0 bottom
R30  1k  [0402-TIGHT]  166.62,20.83 0 bottom
R31  1k  [0402-TIGHT]  174.75,19.84 270 bottom
R32  100k  [0402-TIGHT]  177.75,15.22 0 bottom
R33  10k  [0402-TIGHT]  15.52,53.71 180 bottom
R34  1k  [0402-TIGHT]  26.65,49.02 180 bottom
R35  1k  [0402-TIGHT]  18.53,50.01 90 bottom
R36  100k  [0402-TIGHT]  15.52,54.63 180 bottom
R37  10k  [0402-TIGHT]  38.03,53.71 180 bottom
R38  1k  [0402-TIGHT]  49.16,49.02 180 bottom
R39  1k  [0402-TIGHT]  41.04,50.01 90 bottom
R40  100k  [0402-TIGHT]  38.03,54.63 180 bottom
R41  10k  [0402-TIGHT]  60.54,53.71 180 bottom
R42  1k  [0402-TIGHT]  71.66,49.02 180 bottom
R43  1k  [0402-TIGHT]  63.54,50.01 90 bottom
R44  100k  [0402-TIGHT]  60.54,54.63 180 bottom
R45  10k  [0402-TIGHT]  83.05,53.71 180 bottom
R46  1k  [0402-TIGHT]  94.17,49.02 180 bottom
R47  1k  [0402-TIGHT]  86.05,50.01 90 bottom
R48  100k  [0402-TIGHT]  83.05,54.63 180 bottom
R49  10k  [0402-TIGHT]  105.55,53.71 180 bottom
R50  1k  [0402-TIGHT]  116.68,49.02 180 bottom
R51  1k  [0402-TIGHT]  108.56,50.01 90 bottom
R52  100k  [0402-TIGHT]  105.55,54.63 180 bottom
R53  10k  [0402-TIGHT]  128.06,53.71 180 bottom
R54  1k  [0402-TIGHT]  139.19,49.02 180 bottom
R55  1k  [0402-TIGHT]  131.07,50.01 90 bottom
R56  100k  [0402-TIGHT]  128.06,54.63 180 bottom
R57  10k  [0402-TIGHT]  150.57,53.71 180 bottom
R58  1k  [0402-TIGHT]  161.7,49.02 180 bottom
R59  1k  [0402-TIGHT]  153.58,50.01 90 bottom
R60  100k  [0402-TIGHT]  150.57,54.63 180 bottom
R61  10k  [0402-TIGHT]  173.08,53.71 180 bottom
R62  1k  [0402-TIGHT]  184.2,49.02 180 bottom
R63  1k  [0402-TIGHT]  176.08,50.01 90 bottom
R64  100k  [0402-TIGHT]  173.08,54.63 180 bottom
U1  W25QXX128MBIT-6X5-NO_CENTER  [WSON-8-6X5-NO_CENTERPAD]  18.41,11.94 0 bottom
U2  ATSAMD51J20A-A  [TQFP64]  17.86,11.85 270 top
U3  W25QXX128MBIT-6X5-NO_CENTER  [WSON-8-6X5-NO_CENTERPAD]  40.92,11.94 0 bottom
U4  ATSAMD51J20A-A  [TQFP64]  40.36,11.85 270 top
U5  W25QXX128MBIT-6X5-NO_CENTER  [WSON-8-6X5-NO_CENTERPAD]  63.43,11.94 0 bottom
U6  ATSAMD51J20A-A  [TQFP64]  62.87,11.85 270 top
U7  W25QXX128MBIT-6X5-NO_CENTER  [WSON-8-6X5-NO_CENTERPAD]  85.94,11.94 0 bottom
U8  ATSAMD51J20A-A  [TQFP64]  85.38,11.85 270 top
U9  W25QXX128MBIT-6X5-NO_CENTER  [WSON-8-6X5-NO_CENTERPAD]  108.45,11.94 0 bottom
U10  ATSAMD51J20A-A  [TQFP64]  107.89,11.85 270 top
U11  W25QXX128MBIT-6X5-NO_CENTER  [WSON-8-6X5-NO_CENTERPAD]  130.95,11.94 0 bottom
U12  ATSAMD51J20A-A  [TQFP64]  130.4,11.85 270 top
U13  W25QXX128MBIT-6X5-NO_CENTER  [WSON-8-6X5-NO_CENTERPAD]  153.46,11.94 0 bottom
U14  ATSAMD51J20A-A  [TQFP64]  152.91,11.85 270 top
U15  W25QXX128MBIT-6X5-NO_CENTER  [WSON-8-6X5-NO_CENTERPAD]  175.97,11.94 0 bottom
U16  ATSAMD51J20A-A  [TQFP64]  175.41,11.85 270 top
U17  W25QXX128MBIT-6X5-NO_CENTER  [WSON-8-6X5-NO_CENTERPAD]  17.3,57.91 180 bottom
U18  ATSAMD51J20A-A  [TQFP64]  17.86,58 90 top
U19  W25QXX128MBIT-6X5-NO_CENTER  [WSON-8-6X5-NO_CENTERPAD]  39.81,57.91 180 bottom
U20  ATSAMD51J20A-A  [TQFP64]  40.37,58 90 top
U21  W25QXX128MBIT-6X5-NO_CENTER  [WSON-8-6X5-NO_CENTERPAD]  62.32,57.91 180 bottom
U22  ATSAMD51J20A-A  [TQFP64]  62.87,58 90 top
U23  W25QXX128MBIT-6X5-NO_CENTER  [WSON-8-6X5-NO_CENTERPAD]  84.83,57.91 180 bottom
U24  ATSAMD51J20A-A  [TQFP64]  85.38,58 90 top
U25  W25QXX128MBIT-6X5-NO_CENTER  [WSON-8-6X5-NO_CENTERPAD]  107.33,57.91 180 bottom
U26  ATSAMD51J20A-A  [TQFP64]  107.89,58 90 top
U27  W25QXX128MBIT-6X5-NO_CENTER  [WSON-8-6X5-NO_CENTERPAD]  129.84,57.91 180 bottom
U28  ATSAMD51J20A-A  [TQFP64]  130.4,58 90 top
U29  W25QXX128MBIT-6X5-NO_CENTER  [WSON-8-6X5-NO_CENTERPAD]  152.35,57.91 180 bottom
U30  ATSAMD51J20A-A  [TQFP64]  152.91,58 90 top
U31  W25QXX128MBIT-6X5-NO_CENTER  [WSON-8-6X5-NO_CENTERPAD]  174.86,57.91 180 bottom
U32  ATSAMD51J20A-A  [TQFP64]  175.41,58 90 top
U$1  [MICROMOD_MI_LOGO_.35]  27.3,7.37 90 top
U$2  [SAMD510]  40.09,4.86 0 bottom
U$3  [SAMD510]  49.94,7.87 90 top
U$4  [MICROMOD_LOGO_.35]  22.23,4.95 0 bottom
U$5  [SAMD510]  17.58,4.86 0 bottom
U$6  [SAMD510]  27.43,7.87 90 top
U$7  [SFE_LOGO_FLAME_.1]  8.36,6.07 0 top
U$8  [STAT0]  6.98,19.68 0 top
U$9  [SFE_LOGO_FLAME_.1]  30.87,6.07 0 top
U$10  [STAT0]  29.49,19.68 0 top
U$11  [MICROMOD_MI_LOGO_.35]  49.81,7.37 90 top
U$12  [MICROMOD_LOGO_.35]  44.73,4.95 0 bottom
U$13  [SAMD510]  62.6,4.86 0 bottom
U$14  [SAMD510]  72.45,7.87 90 top
U$15  [SFE_LOGO_FLAME_.1]  53.38,6.07 0 top
U$16  [STAT0]  52,19.68 0 top
U$17  [MICROMOD_MI_LOGO_.35]  72.32,7.37 90 top
U$18  [MICROMOD_LOGO_.35]  67.24,4.95 0 bottom
U$19  [SAMD510]  85.11,4.86 0 bottom
U$20  [SAMD510]  94.96,7.87 90 top
U$21  [SFE_LOGO_FLAME_.1]  75.89,6.07 0 top
U$22  [STAT0]  74.51,19.68 0 top
U$23  [MICROMOD_MI_LOGO_.35]  94.83,7.37 90 top
U$24  [MICROMOD_LOGO_.35]  89.75,4.95 0 bottom
U$25  [SAMD510]  107.62,4.86 0 bottom
U$26  [SAMD510]  117.46,7.87 90 top
U$27  [SFE_LOGO_FLAME_.1]  98.4,6.07 0 top
U$28  [STAT0]  97.02,19.68 0 top
U$29  [MICROMOD_MI_LOGO_.35]  117.34,7.37 90 top
U$30  [MICROMOD_LOGO_.35]  112.26,4.95 0 bottom
U$31  [SAMD510]  130.12,4.86 0 bottom
U$32  [SAMD510]  139.97,7.87 90 top
U$33  [SFE_LOGO_FLAME_.1]  120.9,6.07 0 top
U$34  [STAT0]  119.52,19.68 0 top
U$35  [MICROMOD_MI_LOGO_.35]  139.84,7.37 90 top
U$36  [MICROMOD_LOGO_.35]  134.76,4.95 0 bottom
U$37  [SAMD510]  152.63,4.86 0 bottom
U$38  [SAMD510]  162.48,7.87 90 top
U$39  [SFE_LOGO_FLAME_.1]  143.41,6.07 0 top
U$40  [STAT0]  142.03,19.68 0 top
U$41  [MICROMOD_MI_LOGO_.35]  162.35,7.37 90 top
U$42  [MICROMOD_LOGO_.35]  157.27,4.95 0 bottom
U$43  [SAMD510]  175.14,4.86 0 bottom
U$44  [SAMD510]  184.99,7.87 90 top
U$45  [SFE_LOGO_FLAME_.1]  165.92,6.07 0 top
U$46  [STAT0]  164.54,19.68 0 top
U$47  [MICROMOD_MI_LOGO_.35]  184.86,7.37 90 top
U$48  [MICROMOD_LOGO_.35]  179.78,4.95 0 bottom
U$49  [SAMD510]  18.13,64.99 180 bottom
U$50  [SAMD510]  8.28,61.98 270 top
U$51  [SFE_LOGO_FLAME_.1]  27.35,63.78 180 top
U$52  [STAT0]  28.73,50.16 180 top
U$53  [MICROMOD_MI_LOGO_.35]  8.41,62.48 270 top
U$54  [MICROMOD_LOGO_.35]  13.49,64.9 180 bottom
U$55  [SAMD510]  40.64,64.99 180 bottom
U$56  [SAMD510]  30.79,61.98 270 top
U$57  [SFE_LOGO_FLAME_.1]  49.86,63.78 180 top
U$58  [STAT0]  51.24,50.16 180 top
U$59  [MICROMOD_MI_LOGO_.35]  30.92,62.48 270 top
U$60  [MICROMOD_LOGO_.35]  36,64.9 180 bottom
U$61  [SAMD510]  63.15,64.99 180 bottom
U$62  [SAMD510]  53.3,61.98 270 top
U$63  [SFE_LOGO_FLAME_.1]  72.37,63.78 180 top
U$64  [STAT0]  73.75,50.16 180 top
U$65  [MICROMOD_MI_LOGO_.35]  53.43,62.48 270 top
U$66  [MICROMOD_LOGO_.35]  58.51,64.9 180 bottom
U$67  [SAMD510]  85.66,64.99 180 bottom
U$68  [SAMD510]  75.81,61.98 270 top
U$69  [SFE_LOGO_FLAME_.1]  94.88,63.78 180 top
U$70  [STAT0]  96.26,50.16 180 top
U$71  [MICROMOD_MI_LOGO_.35]  75.94,62.48 270 top
U$72  [MICROMOD_LOGO_.35]  81.02,64.9 180 bottom
U$73  [SAMD510]  108.16,64.99 180 bottom
U$74  [SAMD510]  98.32,61.98 270 top
U$75  [SFE_LOGO_FLAME_.1]  117.38,63.78 180 top
U$76  [STAT0]  118.76,50.16 180 top
U$77  [MICROMOD_MI_LOGO_.35]  98.44,62.48 270 top
U$78  [MICROMOD_LOGO_.35]  103.52,64.9 180 bottom
U$79  [SAMD510]  130.67,64.99 180 bottom
U$80  [SAMD510]  120.83,61.98 270 top
U$81  [SFE_LOGO_FLAME_.1]  139.89,63.78 180 top
U$82  [STAT0]  141.27,50.16 180 top
U$83  [MICROMOD_MI_LOGO_.35]  120.95,62.48 270 top
U$84  [MICROMOD_LOGO_.35]  126.03,64.9 180 bottom
U$85  [SAMD510]  153.18,64.99 180 bottom
U$86  [SAMD510]  143.33,61.98 270 top
U$87  [SFE_LOGO_FLAME_.1]  162.4,63.78 180 top
U$88  [STAT0]  163.78,50.16 180 top
U$89  [MICROMOD_MI_LOGO_.35]  143.46,62.48 270 top
U$90  [MICROMOD_LOGO_.35]  148.54,64.9 180 bottom
U$91  [SAMD510]  175.69,64.99 180 bottom
U$92  [SAMD510]  165.84,61.98 270 top
U$93  [SFE_LOGO_FLAME_.1]  184.91,63.78 180 top
U$94  [STAT0]  186.29,50.16 180 top
U$95  [MICROMOD_MI_LOGO_.35]  165.97,62.48 270 top
U$96  [MICROMOD_LOGO_.35]  171.05,64.9 180 bottom
Y1  32.768kHz  [CRYSTAL-SMD-3.2X1.5MM]  9.52,15.37 270 top
Y2  32.768kHz  [CRYSTAL-SMD-3.2X1.5MM]  32.03,15.37 270 top
Y3  32.768kHz  [CRYSTAL-SMD-3.2X1.5MM]  54.54,15.37 270 top
Y4  32.768kHz  [CRYSTAL-SMD-3.2X1.5MM]  77.05,15.37 270 top
Y5  32.768kHz  [CRYSTAL-SMD-3.2X1.5MM]  99.56,15.37 270 top
Y6  32.768kHz  [CRYSTAL-SMD-3.2X1.5MM]  122.06,15.37 270 top
Y7  32.768kHz  [CRYSTAL-SMD-3.2X1.5MM]  144.57,15.37 270 top
Y8  32.768kHz  [CRYSTAL-SMD-3.2X1.5MM]  167.08,15.37 270 top
Y9  32.768kHz  [CRYSTAL-SMD-3.2X1.5MM]  26.19,54.48 90 top
Y10  32.768kHz  [CRYSTAL-SMD-3.2X1.5MM]  48.7,54.48 90 top
Y11  32.768kHz  [CRYSTAL-SMD-3.2X1.5MM]  71.21,54.48 90 top
Y12  32.768kHz  [CRYSTAL-SMD-3.2X1.5MM]  93.72,54.48 90 top
Y13  32.768kHz  [CRYSTAL-SMD-3.2X1.5MM]  116.22,54.48 90 top
Y14  32.768kHz  [CRYSTAL-SMD-3.2X1.5MM]  138.73,54.48 90 top
Y15  32.768kHz  [CRYSTAL-SMD-3.2X1.5MM]  161.24,54.48 90 top
Y16  32.768kHz  [CRYSTAL-SMD-3.2X1.5MM]  183.75,54.48 90 top

## Library data of the parts
C1 C2 C12 C13 C23 C24 C34 C35 C45 C46 C56 C57 C67 C68 C78 C79 C89 C90 C100 C101 C111 C112 C122 C123 C133 C134 C144 C145 C155 C156 C166 C167 = SparkFun-Capacitors; PROD_ID: CAP-13063
C3 C5-C7 C9 C10 C14 C16-C19 C21 C25 C27-C30 C32 C36 C38-C41 C43 C47 C49-C52 C54 C58 C60-C63 C65 C69 C71-C74 C76 C80 C82-C85 C87 C91 C93-C96 C98 C102 C104-C107 C109 C113 C115-C118 C120 C124 C126-C129 C131 C135 C137-C140 C142 C146 C148-C151 C153 C157 C159-C162 C164 C168 C170-C173 C175 = SparkFun-Capacitors; PROD_ID: CAP-15083
C4 C8 C15 C20 C26 C31 C37 C42 C48 C53 C59 C64 C70 C75 C81 C86 C92 C97 C103 C108 C114 C119 C125 C130 C136 C141 C147 C152 C158 C163 C169 C174 = SparkFun-Capacitors; PROD_ID: CAP-14848
C11 C22 C33 C44 C55 C66 C77 C88 C99 C110 C121 C132 C143 C154 C165 C176 = SparkFun-Capacitors; PROD_ID: CAP-14240
D1 D2 D5 D7 D9 D11 D13 D15 D17 D19 D21 D23 D25 D27 D29 D31 = SparkFun-LED; PROD_ID: DIO-08575
D3 D4 D6 D8 D10 D12 D14 D16 D18 D20 D22 D24 D26 D28 D30 D32 = SparkFun-DiscreteSemi; PROD_ID: DIO-11623
E$1-E$4 FD1-FD64 LOGO1-LOGO32 U$7 U$9 U$15 U$21 U$27 U$33 U$39 U$45 U$51 U$57 U$63 U$69 U$75 U$81 U$87 U$93 = SparkFun-Aesthetics
E$5 E$6 = SparkFun-Retired
J1-J16 U$1 U$4 U$11 U$12 U$17 U$18 U$23 U$24 U$29 U$30 U$35 U$36 U$41 U$42 U$47 U$48 U$53 U$54 U$59 U$60 U$65 U$66 U$71 U$72 U$77 U$78 U$83 U$84 U$89 U$90 U$95 U$96 = SparkFun-MicroMod
L1-L16 = SparkFun-Coils; PROD_ID: NDUC-15133
R1 R5 R9 R13 R17 R21 R25 R29 R33 R37 R41 R45 R49 R53 R57 R61 = SparkFun-Resistors; PROD_ID: RES-14241
R2 R3 R6 R7 R10 R11 R14 R15 R18 R19 R22 R23 R26 R27 R30 R31 R34 R35 R38 R39 R42 R43 R46 R47 R50 R51 R54 R55 R58 R59 R62 R63 = SparkFun-Resistors; PROD_ID: RES-14342
R4 R8 R12 R16 R20 R24 R28 R32 R36 R40 R44 R48 R52 R56 R60 R64 = SparkFun-Resistors; PROD_ID: RES-13495
U1 U3 U5 U7 U9 U11 U13 U15 U17 U19 U21 U23 U25 U27 U29 U31 = SparkFun-MicroMod; PROD_ID: IC-15107
U2 U4 U6 U8 U10 U12 U14 U16 U18 U20 U22 U24 U26 U28 U30 U32 = SparkFun-IC-Microcontroller; PROD_ID: IC-13952
U$2 U$3 U$5 U$6 U$13 U$14 U$19 U$20 U$25 U$26 U$31 U$32 U$37 U$38 U$43 U$44 U$49 U$50 U$55 U$56 U$61 U$62 U$67 U$68 U$73 U$74 U$79 U$80 U$85 U$86 U$91 U$92 = Board Label
U$8 U$10 U$16 U$22 U$28 U$34 U$40 U$46 U$52 U$58 U$64 U$70 U$76 U$82 U$88 U$94 = stat
Y1-Y16 = SparkFun-Clocks; PROD_ID: XTAL-13062